# Altium PCB SL1 Xilinx Spartan-IIE PQ208 Rev1.01.PcbDoc (part 1 of 3)
Units mil, origin at the board's own origin, x right, y up, seen from the top; angles counter-clockwise.
Board outline 7087.04 x 1988.61 mil, 2 copper layers (Top Layer, Bottom Layer), stack 64.8 mil thick; 115 components, 126 nets, 642 pads, 225 vias.
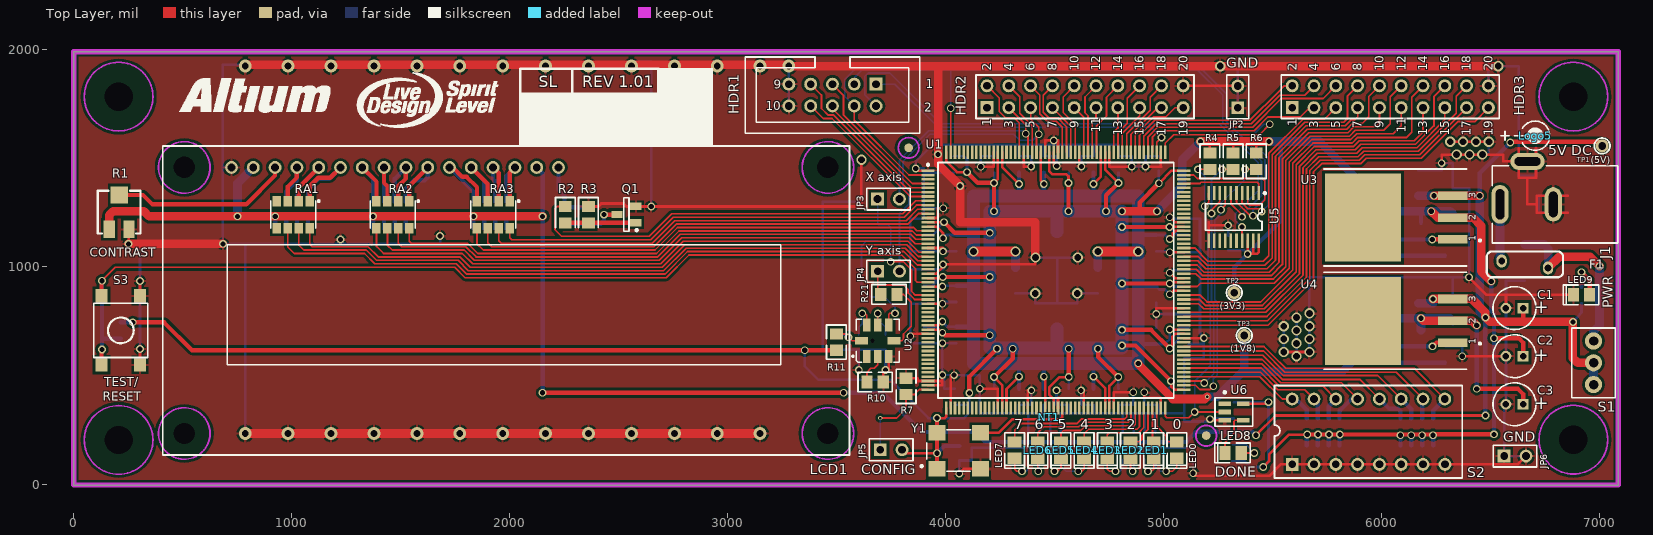
[diagram p0: Top Layer view]
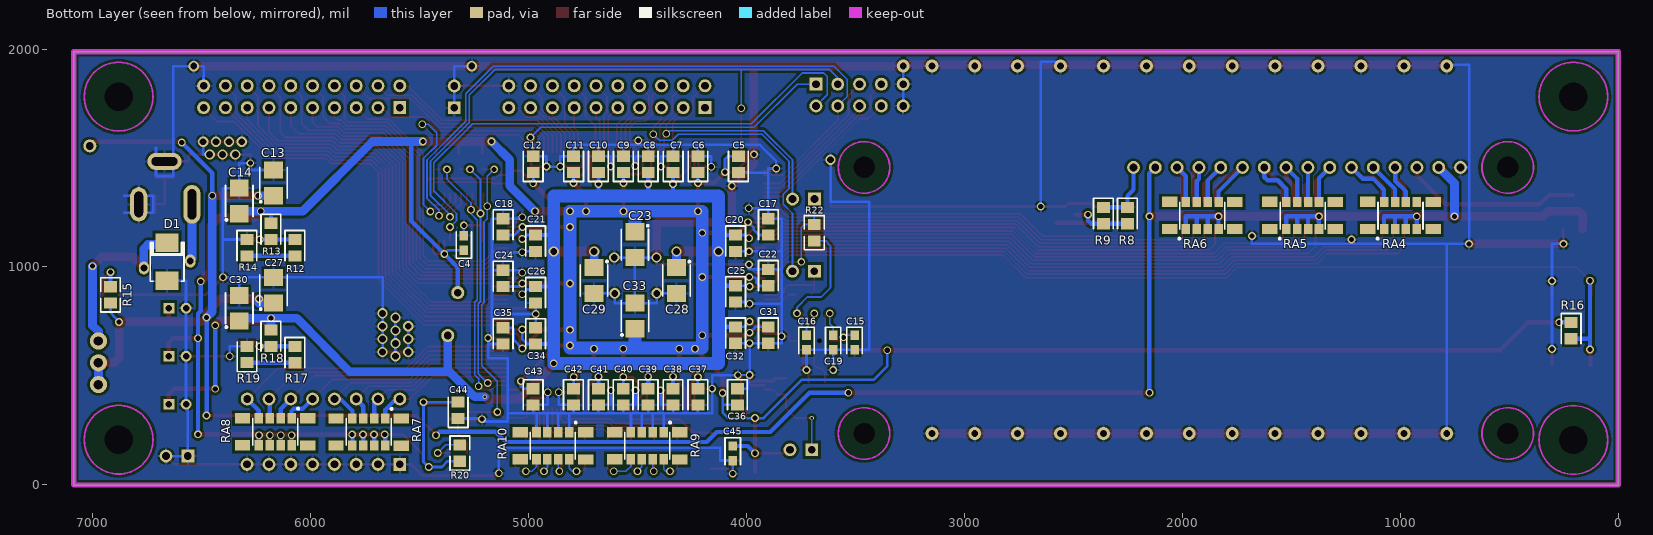
[diagram p1: Bottom Layer view, seen from below]

## Layer stack, top to bottom
Top Solder: solder mask 0.4, Solder Resist, Dk 3.5
Top Layer: signal copper 1.4
Dielectric1: core 62, FR-4, Dk 4.8
Bottom Layer: signal copper 1.4
Bottom Solder: solder mask 0.4, Solder Resist, Dk 3.5

## Board outline
0,-0.21 cw(c0,0) -0.21,0 -0.21,1988.19 cw(c0,1988.19) 0,1988.4 7086.61,1988.4 cw(c7086.61,1988.19) 7086.83,1988.19 7086.83,0 cw(c7086.61,0) 7086.61,-0.21

## Design rules (kind name [scope] priority, off if disabled: settings)
Clearance "Clearance_Power Polygon" [inpolygon and innetclass('Power')] p1: gap=11.81 ignorepadtopadclearanceinfootprint=FALSE except(0: Arc-Hole Track-Hole SMDPad-Hole THPad-Hole Via-Hole Fill-Hole Poly-Hole Region-Hole Text-Hole)
Clearance [All] p2: gap=7.87 ignorepadtopadclearanceinfootprint=FALSE except(0: Arc-Hole Track-Hole SMDPad-Hole THPad-Hole Via-Hole Fill-Hole Poly-Hole Region-Hole Text-Hole) // General
ComponentClearance ComponentClearance_D1_F1 [InComponent('D1') vs InComponent('F1')] p1 off: gap=1.18 collisioncheckmode=3 verticalgap=10 showdistances=FALSE
ComponentClearance ComponentClearance_JP4_R21 [InComponent('JP4') vs InComponent('R21')] p2 off: gap=2.76 collisioncheckmode=3 verticalgap=10 showdistances=FALSE
ComponentClearance ComponentClearance_LCD1_U2 [InComponent('LCD1') vs InComponent('U2')] p3 off: gap=3.54 collisioncheckmode=3 verticalgap=10 showdistances=FALSE
ComponentClearance ComponentClearance_U1_U6 [InComponent('U1') vs InComponent('U6')] p4 off: gap=3.94 collisioncheckmode=3 verticalgap=10 showdistances=FALSE
ComponentClearance ComponentClearance_S2 [InComponent('S2') vs InComponent('RA7') Or InComponent('RA8')] p5 off: gap=3.94 collisioncheckmode=3 verticalgap=10 showdistances=FALSE // Why is such a small clearance necessary?
ComponentClearance ComponentClearance_LCD1_R11 [InComponent('LCD1') vs InComponent('R11')] p6 off: gap=6.3 collisioncheckmode=3 verticalgap=10 showdistances=FALSE
ComponentClearance ComponentClearance_J1_Logo5 [InComponent('J1') vs InComponent('Logo5')] p7 off: gap=7.48 collisioncheckmode=3 verticalgap=10 showdistances=FALSE
ComponentClearance ComponentClearance_R2_R3 [InComponent('R2') vs InComponent('R3')] p8 off: gap=7.48 collisioncheckmode=3 verticalgap=10 showdistances=FALSE
ComponentClearance ComponentClearance_R5 [InComponent('R5') vs InComponent('R4') Or InComponent('R6')] p9 off: gap=7.48 collisioncheckmode=3 verticalgap=10 showdistances=FALSE
ComponentClearance ComponentClearance_LEDs [HasFootprint('SMD _LED') vs HasFootprint('SMD _LED')] p10 off: gap=7.48 collisioncheckmode=3 verticalgap=10 showdistances=FALSE
ComponentClearance ComponentClearance_R7_R10 [InComponent('R7') vs InComponent('R10')] p11 off: gap=9.45 collisioncheckmode=3 verticalgap=10 showdistances=FALSE
ComponentClearance ComponentClearance_U1 [InComponent('U1') vs Not InComponent('NT1') && Not InComponent('LED8')] p12 off: gap=10 collisioncheckmode=3 verticalgap=10 showdistances=FALSE
ComponentClearance ComponentClearance_General [Not InComponent('U1') vs Not InComponent('U1')] p13 off: gap=10 collisioncheckmode=3 verticalgap=10 showdistances=FALSE
ComponentClearance ComponentClearance_Default [All] p14: gap=5 collisioncheckmode=3 verticalgap=10 showdistances=FALSE
FabricationTestPointUsage TestPointUsage [All] p1 off: valid=0 allowmultiple=FALSE
FabricationTestpoint Testpoint [All] p1 off: side=3 testpointundercomponent=TRUE minsize=40 maxsize=100 preferedsize=60 minholesize=0 maxholesize=40 preferedholesize=32 testpointgrid=1 allowsidetop=TRUE allowsidebottom=TRUE usegrid=TRUE gridtolerance=0.01
HoleSize [All] p1: absolutevalues=TRUE maxlimit=350 minlimit=0 maxpercent=80.000 minpercent=20.000
PlaneConnect [All] p1: planeconnectstyle=Relief reliefexpansion=11.81 reliefentries=4 reliefconductorwidth=7.87 reliefairgap=7.87
PolygonConnect PolygonConnect_Power [innetclass('Power')] p1: connectstyle=Relief reliefconductorwidth=11.81 reliefentries=4 polygonreliefangle="90 Angle" airgapwidth=10
PolygonConnect [All] p2: connectstyle=Relief reliefconductorwidth=7.87 reliefentries=4 polygonreliefangle="90 Angle" airgapwidth=10
RoutingVias RoutingVias_Power [innetclass('Power')] p1: holewidth=23.62 width=35.43 viastyle="Through Hole" minholewidth=11.81 minwidth=19.68 maxholewidth=31.5 maxwidth=59.06
RoutingVias [All] p2: holewidth=23.62 width=35.43 viastyle="Through Hole" minholewidth=11.81 minwidth=19.68 maxholewidth=23.62 maxwidth=35.43
SilkToSolderMaskClearance SilkscreenOverComponentPads [IsPad] p1: minsilkscreentomaskgap=10 clearancetoexposedcopper=TRUE
SolderMaskExpansion SolderMaskExpansion_Power_Vias [isvia] p1: expansion=0 istentingtop=FALSE
SolderMaskExpansion [All] p2: expansion=3.94 istentingtop=FALSE
Width Width_Power [innetclass('Power') and not inpolygon] p1: maxlimit=78.74 minlimit=11.81 preferedwidth=11.81
Width [All] p2: maxlimit=78.74 minlimit=7.87 preferedwidth=7.87
24 further rules are at their usual default settings.

## Classes and differential pairs
component class U_SL_LCD_SW_LED: LCD1 LED0 LED1 LED2 LED3 LED4 LED5 LED6 LED7 Q1 R1 R2 R3 R8 R9 R16 RA1 RA2 RA3 RA4 RA5 RA6 RA7 RA8 RA9 RA10 S2 S3
component class U_SL_FPGA_Auto_2E: U1
component class U_SL_Config: C4 C44 LED8 R4 R5 R6 R20 U5 U6
component class SL_FPGA_Manual_2E: C1 C2 C3 C5 C6 C7 C8 C9 C10 C11 C12 C13 C14 C17 C18 C20 C21 C22 C23 C24 C25 C26 C27 C28 C29 C30 C31 C32 C33 C34 C35 C36 C37 C38 C39 C40 C41 C42 C43 D1 F1 J1 JP2 JP6 LED9 R12 R13 R14 R15 R17 R18 R19 S1 TP1 TP2 TP3 U3 U4
net class SW[7..0]: SW0 SW1 SW2 SW3 SW4 SW5 SW6 SW7
net class LEDS[7..0]: LEDS0 LEDS1 LEDS2 LEDS3 LEDS4 LEDS5 LEDS6 LEDS7
net class LCD_DB[7..0]: LCD_DB0 LCD_DB1 LCD_DB2 LCD_DB3 LCD_DB4 LCD_DB5 LCD_DB6 LCD_DB7
net class Power: 5V GND VCCINT VCCO

## Components (designator, comment, footprint, x,y, rotation, side; value= is the part's Value field where it differs from the comment)
C1 "100uF 16V" CAPPR2-5X6.8 6610.24,811.02 r180 top
C2 "100uF 16V" CAPPR2-5X6.8 6610.24,590.55 r180 top
C3 "100uF 16V" CAPPR2-5X6.8 6610.24,370.08 r180 top
C4 "10nF" CC1608-0603 5296.26,1110.24 r90 bottom
C5 "0.1uF" CC2012-0805 4037.4,1470.47 r90 bottom
C6 "0.1uF" CC2012-0805 4222.44,1470.47 r90 bottom
C7 "0.1uF" CC2012-0805 4336.61,1470.47 r90 bottom
C8 "0.1uF" CC2012-0805 4450.79,1470.47 r90 bottom
C9 "0.1uF" CC2012-0805 4564.96,1470.47 r90 bottom
C10 "0.1uF" CC2012-0805 4679.13,1470.47 r90 bottom
C11 "0.1uF" CC2012-0805 4793.31,1470.47 r90 bottom
C12 "0.1uF" CC2012-0805 4978.35,1470.47 r90 bottom
C13 "10uF" MCCT-B 6169.29,1385.83 r90 bottom
C14 "10uF" MCCT-B 6326.77,1303.15 r90 bottom
C15 "100nF" CC1608-0603 3503.94,653.54 r270 bottom
C16 "100nF" CC1608-0603 3724.41,653.54 r270 bottom
C17 "0.1uF" CC2012-0805 3899.61,1184.06 r270 bottom
C18 "0.1uF" CC2012-0805 5116.14,1184.06 r270 bottom
C19 "100nF" CC1608-0603 3602.36,653.54 r270 bottom
C20 "0.1uF" CC2012-0805 4049.21,1109.25 r270 bottom
C21 "0.1uF" CC2012-0805 4966.54,1109.25 r270 bottom
C22 "0.1uF" CC2012-0805 3899.61,951.77 r270 bottom
C23 "10uF" MCCT-B 4511.81,1102.36 r270 bottom
C24 "0.1uF" CC2012-0805 5116.14,947.83 r270 bottom
C25 "0.1uF" CC2012-0805 4049.21,876.97 r270 bottom
C26 "0.1uF" CC2012-0805 4966.54,873.03 r270 bottom
C27 "10uF" MCCT-B 6169.29,893.7 r90 bottom
C28 "10uF" MCCT-B 4320.87,937.99 r270 bottom
C29 "10uF" MCCT-B 4698.82,937.99 r270 bottom
C30 "10uF" MCCT-B 6326.77,811.02 r90 bottom
C31 "0.1uF" CC2012-0805 3899.61,687.99 r270 bottom
C32 "0.1uF" CC2012-0805 4049.21,687.99 r270 bottom
C33 "10uF" MCCT-B 4511.81,775.59 r90 bottom
C34 "0.1uF" CC2012-0805 4966.54,684.06 r270 bottom
C35 "0.1uF" CC2012-0805 5116.14,684.06 r270 bottom
C36 "0.1uF" CC2012-0805 4041.34,404.53 r270 bottom
C37 "0.1uF" CC2012-0805 4222.44,404.53 r270 bottom
C38 "0.1uF" CC2012-0805 4336.61,404.53 r270 bottom
C39 "0.1uF" CC2012-0805 4450.79,404.53 r270 bottom
C40 "0.1uF" CC2012-0805 4564.96,404.53 r270 bottom
C41 "0.1uF" CC2012-0805 4679.13,404.53 r270 bottom
C42 "0.1uF" CC2012-0805 4793.31,404.53 r270 bottom
C43 "0.1uF" CC2012-0805 4978.35,404.53 r270 bottom
C44 "0.1uF" CC2012-0805 5322.83,342.52 r90 bottom
C45 "10nF" CC1608-0603 4062.99,145.67 r270 bottom
D1 "SM6T6V8A" DO214 6657.48,1023.58 r90 bottom
F1 "Polyswitch, 1.1A" RUE160_0.2 6657.48,1011.81 r0 top
HDR1 "Header 5X2" HDR2X5_LP 3681.1,1838.58 r0 top
HDR2 "Header 10X2" HDR2X10 4190.55,1730.71 r0 top locked
HDR3 "Header 10X2" HDR2X10 5590.55,1730.71 r0 top locked
J1 "KLD-0202-B" KLD-0202 7082.68,1287.4 r180 top
JP2 "GND" HDR1X2 5340.55,1730.71 r90 top locked
JP3 "X axis" HDR1X2 3688.72,1311.42 r0 top
JP4 "Y axis" HDR1X2 3688.98,980.31 r0 top
JP5 "CONFIG" HDR1X2 3700.79,161.42 r0 top
JP6 "GND" HDR1X2 6562.99,132.53 r0 top
LCD1 "162A" 162A 724.41,1456.69 r0 top locked
LED0 "HSMH-C170" "SMD _LED" 5061.02,160.43 r90 top
LED1 "HSMH-C170" "SMD _LED" 4954.72,160.43 r90 top
LED2 "HSMH-C170" "SMD _LED" 4848.43,160.43 r90 top
LED3 "HSMH-C170" "SMD _LED" 4742.13,160.43 r90 top
LED4 "HSMH-C170" "SMD _LED" 4635.83,160.43 r90 top
LED5 "HSMH-C170" "SMD _LED" 4529.53,160.43 r90 top
LED6 "HSMH-C170" "SMD _LED" 4423.23,160.43 r90 top
LED7 "HSMH-C170" "SMD _LED" 4316.93,160.43 r90 top
LED8 "HSMH-C170" "SMD _LED" 5318.9,146.65 r0 top
LED9 "HSMH-C170" "SMD _LED" 6917.32,872.05 r0 top
Logo5 "5V" "5V SYMBOL" 6704.72,1602.36 r0 top
NT1 "GND" NT 4475.83,321.81 r270 top net-tie
Q1 "2N7002" SO-G3 2535.43,1240.16 r90 top
R1 "20K" POT4MM-2 208.66,1251.97 r90 top
R2 "560R" CC2012-0805 2255.91,1240.16 r270 top
R3 "10K" CC2012-0805 2362.2,1240.16 r270 top
R4 "4K7" CR2012-0805 5212.6,1485.24 r270 top
R5 "4K7" CR2012-0805 5318.9,1485.24 r270 top
R6 "4K7" CR2012-0805 5425.2,1485.24 r270 top
R7 "1K" CR2012-0805 3818.9,452.76 r270 top
R8 "68R" CC2012-0805 2251.97,1236.21 r270 bottom
R9 "68R" CC2012-0805 2362.2,1236.21 r270 bottom
R10 "680R" CR2012-0805 3677.17,472.44 r180 top
R11 "0R" CR2012-0805 3499.21,655.51 r90 top
R12 "100R" CC2012-0805 6070.87,1088.58 r270 bottom
R13 "120R" CC2012-0805 6181.1,1163.38 r270 bottom
R14 "100R" CC2012-0805 6291.34,1088.58 r270 bottom
R15 "270R" CR2012-0805 6917.32,872.04 r270 bottom
R16 "4K7" CC2012-0805 216.54,708.65 r270 bottom
R17 "47R" CC2012-0805 6070.87,598.42 r270 bottom
R18 "120R" CC2012-0805 6181.1,673.22 r270 bottom
R19 "5R6" CC2012-0805 6291.34,598.43 r90 bottom
R20 "270R" CR2012-0805 5314.96,146.65 r270 bottom
R21 "100R" CR2012-0805 3740.16,874.02 r0 top
R22 "100R" CR2012-0805 3688.98,1157.47 r270 bottom
RA1 "270R" MNR34 1007.87,1240.16 r270 top
RA2 "270R" MNR34 1464.57,1240.16 r270 top
RA3 "270R" MNR34 1925.2,1240.16 r270 top
RA4 "4K7" MNR34T 1000,1236.22 r270 bottom
RA5 "4K7" MNR34T 1448.82,1236.22 r270 bottom
RA6 "4K7" MNR34T 1909.45,1236.22 r270 bottom
RA7 "4K7" MNR34T 5732.48,243.09 r90 bottom
RA8 "4K7" MNR34T 6161.42,244.09 r90 bottom
RA9 "270R" MNR34T 4454.72,180.1 r90 bottom
RA10 "270R" MNR34T 4887.8,180.1 r90 bottom
S1 "TL36WW050" PCB_SWITCH 6972.64,460.18 r90 top
S2 "A6ER-8104" DIP-16-KEY 5590.55,94.49 r0 top
S3 "DTSM-61-NR" B3FS_SWITCH 216.54,708.66 r270 top
TP1 "(5V)" TP 7011.81,1555.12 r0 top
TP2 "(3V3)" TP 5324.13,881.88 r0 top
TP3 "(1V8)" TP 5370.08,685.04 r0 top
U1 "XC2S300E-6PQ208C" PQ208 4505.91,939.96 r0 top locked
U2 "ADXL202E" E-8 3688.98,661.42 r90 top
U3 "LM1084IS-ADJ" TO-263 6326.77,1126.77 r90 top
U4 "LM1084IS-ADJ" TO-263 6326.77,653.54 r90 top
U5 "XCF02SVO20C" VO20 5321.85,1229.33 r180 top
U6 "SN74LVC1G04DBV" SO-G5/P.95 5322.83,334.65 r270 top
Y1 "25MHz" QSMO_4200 3960.63,59.06 r0 top

## Footprints (in the part's own frame and the unit in brackets; to place one, negate y for a bottom-side part, rotate by r counter-clockwise, add the part's x,y. Pads: shape width x height; smd on the part's side, far side on the other; paste and mask are expansions set on the pad)
"5V SYMBOL" [mil]
  silkscreen extent -158,-67 67,67
162A [mm]
  round 1.5 hole 0.9: 1(0,0) 2(2.54,0) 3(5.08,0) 4(7.62,0) 5(10.16,0) 6(12.7,0) 7(15.24,0) 8(17.78,0) 9(20.32,0) 10(22.86,0) 11(25.4,0) 12(27.94,0) 13(30.48,0) 14(33.02,0) 15(35.56,0) 16(38.1,0)
  round 2.3 hole 2.5 unplated: M1(-5.5,0) M2(69.5,0) M3(-5.5,-31) M4(69.5,-31)
  Keep-Out Layer circle w0.2: c-5.5,0 r3
  Keep-Out Layer circle w0.2: c-5.5,-31 r3
  Keep-Out Layer circle w0.2: c69.5,-31 r3
  Keep-Out Layer circle w0.2: c69.5,0 r3
  silkscreen extent -8,-33.5 72,2.5, body extent -8.01,-33.5 72,2.5, height 10.16
B3FS_SWITCH [mm]
  rect 1.6x1.4 smd: 1(3.998,-2.244) 2(-4.012,-2.244) 3(3.998,2.246) 4(-4.012,2.246)
  silkscreen extent -3.17,-3.15 3.14,3.16, body extent -4.57,-3.15 4.57,3.16, height 4.57
CAPPR2-5X6.8 [mm]
  rect 1.25x1.25 hole 0.75: 1(-0.994,-0.009)
  round 1.25 hole 0.75: 2(1.006,-0.009)
  silkscreen extent -2.49,-2.51 2.5,2.49, body extent -2.49,-2.51 2.51,2.49, height 10.16
CC1608-0603 [mm]
  rect 1.1x1 smd: 1(-0.843,0.001) 2(0.857,0.001)
  silkscreen extent -1.79,-0.9 1.31,0.9, body extent -1.46,-0.57 1.46,0.57, height 0.76
CC2012-0805 [mm]
  rect 1.3x1.5 smd: 1(-0.945,-0.007) 2(0.955,-0.007)
  silkscreen extent -1.99,-1.16 1.51,1.14, body extent -1.52,-0.7 1.52,0.7, height 0.76
CR2012-0805 [mm]
  rect 1.3x1.5 smd: 1(-0.946,0) 2(0.954,0)
  silkscreen extent -2,-1.15 2,1.15, body extent -1.52,-0.7 1.52,0.7, height 0.76
DIP-16-KEY [mm]
  rect 1.5x1.5 hole 0.9: 1(-0.011,0.001)
  round 1.5 hole 0.9: 2(2.529,0.001) 3(5.069,0.001) 4(7.609,0.001) 5(10.149,0.001) 6(12.689,0.001) 7(15.229,0.001) 8(17.789,0.001) 9(17.769,7.621) 10(15.229,7.621) 11(12.689,7.621) 12(10.149,7.621) 13(7.609,7.621) 14(5.069,7.621) 15(2.529,7.621) 16(-0.011,7.621)
  silkscreen extent -2.06,-1.59 19.82,9.2, body extent -2.03,-1.52 19.81,9.14, height 7.11
DO214 [mil]
  rect 85x106.3 smd: 1(-87.01,0.18) 2(87.99,0.18)
  silkscreen extent -90,-77 90,78, body extent -125,-50 125,50, height 50
E-8 [mil]
  round 15 hole 20 unplated: 0(-0.02,23.98)
  rect 60x35 smd: 1(-72.85,49.98) 2(-72.85,-0.02) 3(-72.85,-50.02) 5(72.82,-50.02) 6(72.82,-0.02) 7(72.82,49.98)
  rect 35x60 smd: 4(-0.02,-74.82) 8(-0.02,74.79)
  silkscreen extent -98,-98 99,118, body extent -95,-95 95,95, height 80
HDR1X2 [mm]
  rect 1.5x1.5 hole 0.9: 1(-0.011,0.007)
  round 1.5 hole 0.9: 2(2.529,0.007)
  silkscreen extent -1.28,-1.26 3.8,1.28, body extent -1.27,-1.27 3.81,1.27, height 10
HDR2X5_LP [mm]
  rect 1.5x1.5 hole 0.9: 1(0.003,0.004)
  round 1.5 hole 0.9: 2(0.003,-2.536) 3(-2.537,0.004) 4(-2.537,-2.536) 5(-5.077,0.004) 6(-5.077,-2.536) 7(-7.617,0.004) 8(-7.617,-2.536) 9(-10.157,0.004) 10(-10.157,-2.536)
  silkscreen extent -15.24,-5.71 5.08,3.18, body extent -15.24,-5.71 5.08,3.18, height 10
HDR2X10 [mm]
  rect 1.5x1.5 hole 0.9: 1(-0.011,0.007)
  round 1.5 hole 0.9: 2(-0.011,2.547) 3(2.529,0.007) 4(2.529,2.547) 5(5.069,0.007) 6(5.069,2.547) 7(7.609,0.007) 8(7.609,2.547) 9(10.149,0.007) 10(10.149,2.547) 11(12.689,0.007) 12(12.689,2.547) 13(15.229,0.007) 14(15.229,2.547) 15(17.769,0.007) 16(17.769,2.547) 17(20.309,0.007) 18(20.309,2.547) 19(22.849,0.007) 20(22.849,2.547)
  silkscreen extent -1.28,-1.26 24.12,3.82, body extent -1.27,-1.27 24.13,3.81, height 10
KLD-0202 [mm]
  oval 2x4.5 hole 1 slot 3.5 at 90 deg: 1(13.692,-0.001)
  oval 2x4 hole 1 slot 3 at 90 deg: 2(7.492,-0.001)
  oval 4x2 hole 1 slot 3 at 0 deg: 3(10.492,-5.001)
  silkscreen extent -0.01,-4.5 14.59,4.5, body extent 0,-4.44 14.6,4.45, height 7.62
MCCT-B [mm]
  rect 2x2.2 smd: 1(-1.505,-0.002) 2(1.495,-0.002)
  silkscreen extent -2.3,-1.6 1.8,1.6, body extent -2.29,-0.89 2.29,0.89, height 1.27
MNR34 [mm]
  rect 1.2x1 smd: 1(-1.578,1.898) 2(-1.578,0.628) 3(-1.578,-0.642) 4(-1.578,-1.912) 5(1.572,-1.912) 6(1.572,-0.642) 7(1.572,0.628) 8(1.572,1.898)
  silkscreen extent -1.68,-2.62 1.55,3.06, body extent -2.03,-2.29 2.03,2.29, height 1.27
MNR34T [mm]
  rect 1.2x1 smd: 1(1.575,-1.896) 2(1.575,-0.626) 3(1.575,0.644) 4(1.575,1.914) 5(-1.575,1.914) 6(-1.575,0.644) 7(-1.575,-0.626) 8(-1.575,-1.896)
  rect 1.2x1.8 smd: STP(-1.6,-3.801) STP(-1.575,3.819) STP(1.575,-3.801) STP(1.575,3.819)
  silkscreen extent -1.55,-2.76 2.79,2.62, body extent -1.65,-2.71 1.68,2.72, height 2
NT [mm]
  rect 0.2x0.2 smd: 1(0.01,0.011) 2(0.51,0.011)
  Top Layer lines w0.3: 0.51,0.011 0.01,0.011
PCB_SWITCH [mm]
  round 2 hole 1.1: 1(0.011,0.005) 2(2.551,0.005) 3(5.091,0.005)
  silkscreen extent -1.54,-2.53 6.59,2.55, body extent -1.52,-2.54 6.6,2.54, height 15
POT4MM-2 [mm]
  rect 2x1.3 smd: CCW(-2.008,-1.162) CW(-2.008,1.138)
  rect 2x2 smd: W(1.992,-0.012)
  silkscreen extent -2.51,-2.51 2.49,2.49, body extent -2.92,-2.41 2.92,2.41, height 3.05
PQ208 [mm]
  rect 1.55x0.3 smd: 1(-14.902,12.738) 2(-14.902,12.238) 3(-14.902,11.738) 4(-14.902,11.238) 5(-14.902,10.738) 6(-14.902,10.238) 7(-14.902,9.738) 8(-14.902,9.238) 9(-14.902,8.738) 10(-14.902,8.238) 11(-14.902,7.738) 12(-14.902,7.238) 13(-14.902,6.738) 14(-14.902,6.238) 15(-14.902,5.738) 16(-14.902,5.238) 17(-14.902,4.738) 18(-14.902,4.238) 19(-14.902,3.738) 20(-14.902,3.238) 21(-14.902,2.738) 22(-14.902,2.238) 23(-14.902,1.738) 24(-14.902,1.238) 25(-14.902,0.738) 26(-14.902,0.238) 27(-14.902,-0.262) 28(-14.902,-0.762) 29(-14.902,-1.262) 30(-14.902,-1.762) 31(-14.902,-2.262) 32(-14.902,-2.762) 33(-14.902,-3.262) 34(-14.902,-3.762) 35(-14.902,-4.262) 36(-14.902,-4.762) 37(-14.902,-5.262) 38(-14.902,-5.762) 39(-14.902,-6.262) 40(-14.902,-6.762) 41(-14.902,-7.262) 42(-14.902,-7.762) 43(-14.902,-8.262) 44(-14.902,-8.762) 45(-14.902,-9.262) 46(-14.902,-9.762) 47(-14.902,-10.262) 48(-14.902,-10.762) 49(-14.902,-11.262) 50(-14.902,-11.762) 51(-14.902,-12.262) 52(-14.902,-12.762) 105(14.898,-12.762) 106(14.898,-12.262) 107(14.898,-11.762) 108(14.898,-11.262) 109(14.898,-10.762) 110(14.898,-10.262) 111(14.898,-9.762) 112(14.898,-9.262) 113(14.898,-8.762) 114(14.898,-8.262) 115(14.898,-7.762) 116(14.898,-7.262) 117(14.898,-6.762) 118(14.898,-6.262) 119(14.898,-5.762) 120(14.898,-5.262) 121(14.898,-4.762) 122(14.898,-4.262) 123(14.898,-3.762) 124(14.898,-3.262) 125(14.898,-2.762) 126(14.898,-2.262) 127(14.898,-1.762) 128(14.898,-1.262) 129(14.898,-0.762) 130(14.898,-0.262) 131(14.898,0.238) 132(14.898,0.738) 133(14.898,1.238) 134(14.898,1.738) 135(14.898,2.238) 136(14.898,2.738) 137(14.898,3.238) 138(14.898,3.738) 139(14.898,4.238) 140(14.898,4.738) 141(14.898,5.238) 142(14.898,5.738) 143(14.898,6.238) 144(14.898,6.738) 145(14.898,7.238) 146(14.898,7.738) 147(14.898,8.238) 148(14.898,8.738) 149(14.898,9.238) 150(14.898,9.738) 151(14.898,10.238) 152(14.898,10.738) 153(14.898,11.238) 154(14.898,11.738) 155(14.898,12.238) 156(14.898,12.738)
  rect 0.3x1.55 smd: 53(-12.752,-14.912) 54(-12.252,-14.912) 55(-11.752,-14.912) 56(-11.252,-14.912) 57(-10.752,-14.912) 58(-10.252,-14.912) 59(-9.752,-14.912) 60(-9.252,-14.912) 61(-8.752,-14.912) 62(-8.252,-14.912) 63(-7.752,-14.912) 64(-7.252,-14.912) 65(-6.752,-14.912) 66(-6.252,-14.912) 67(-5.752,-14.912) 68(-5.252,-14.912) 69(-4.752,-14.912) 70(-4.252,-14.912) 71(-3.752,-14.912) 72(-3.252,-14.912) 73(-2.752,-14.912) 74(-2.252,-14.912) 75(-1.752,-14.912) 76(-1.252,-14.912) 77(-0.752,-14.912) 78(-0.252,-14.912) 79(0.248,-14.912) 80(0.748,-14.912) 81(1.248,-14.912) 82(1.748,-14.912) 83(2.248,-14.912) 84(2.748,-14.912) 85(3.248,-14.912) 86(3.748,-14.912) 87(4.248,-14.912) 88(4.748,-14.912) 89(5.248,-14.912) 90(5.748,-14.912) 91(6.248,-14.912) 92(6.748,-14.912) 93(7.248,-14.912) 94(7.748,-14.912) 95(8.248,-14.912) 96(8.748,-14.912) 97(9.248,-14.912) 98(9.748,-14.912) 99(10.248,-14.912) 100(10.748,-14.912) 101(11.248,-14.912) 102(11.748,-14.912) 103(12.248,-14.912) 104(12.748,-14.912) 157(12.748,14.888) 158(12.248,14.888) 159(11.748,14.888) 160(11.248,14.888) 161(10.748,14.888) 162(10.248,14.888) 163(9.748,14.888) 164(9.248,14.888) 165(8.748,14.888) 166(8.248,14.888) 167(7.748,14.888) 168(7.248,14.888) 169(6.748,14.888) 170(6.248,14.888) 171(5.748,14.888) 172(5.248,14.888) 173(4.748,14.888) 174(4.248,14.888) 175(3.748,14.888) 176(3.248,14.888) 177(2.748,14.888) 178(2.248,14.888) 179(1.748,14.888) 180(1.248,14.888) 181(0.748,14.888) 182(0.248,14.888) 183(-0.252,14.888) 184(-0.752,14.888) 185(-1.252,14.888) 186(-1.752,14.888) 187(-2.252,14.888) 188(-2.752,14.888) 189(-3.252,14.888) 190(-3.752,14.888) 191(-4.252,14.888) 192(-4.752,14.888) 193(-5.252,14.888) 194(-5.752,14.888) 195(-6.252,14.888) 196(-6.752,14.888) 197(-7.252,14.888) 198(-7.752,14.888) 199(-8.252,14.888) 200(-8.752,14.888) 201(-9.252,14.888) 202(-9.752,14.888) 203(-10.252,14.888) 204(-10.752,14.888) 205(-11.252,14.888) 206(-11.752,14.888) 207(-12.252,14.888) 208(-12.752,14.888)
  round 1 smd: FID1(-17.152,15.413) FID2(17.523,-18.112)
  Top Layer keep-out circle w0.2: c-17.152,15.413 r1.2
  Top Layer keep-out circle w0.2: c17.523,-18.137 r1.2
  silkscreen extent -15.03,-13.74 13.72,13.71, body extent -15.35,-15.36 15.35,15.34, height 2.5
QSMO_4200 [mm]
  rect 2x1.8 smd: 1(-0.009,0.39) 2(5.071,0.39) 3(5.071,4.59) 4(-0.009,4.59)
  silkscreen extent -1.91,0.09 6.21,4.94, body extent -1.14,-0.32 6.1,5.3, height 1.5
RUE160_0.2 [mm]
  oval 1.2x1.5 hole 0.8: 1(-2.7,0.4) 2(2.7,-0.4)
  silkscreen extent -4.45,-1.5 4.45,1.5, body extent -4.45,-1.5 4.45,1.5, height 12
"SMD _LED" [mm]
  rect 1.3x1.6 smd: 1(0.948,0.006) 2(-0.952,0.006)
  silkscreen extent -2.13,-1.14 2,1.16, body extent -1.52,-0.64 1.52,0.64, height 1.27
SO-G3 [mm]
  rect 0.85x1.3 smd: 1(-0.939,-1.107) 2(0.961,-1.107) 3(0.011,1.093)
  silkscreen extent -1.94,-1.33 1.96,0.29, body extent -1.65,-1.52 1.65,1.51, height 2.54
SO-G5/P.95 [mm]
  rect 0.55x1.45 smd: 1(-0.954,-1.07) 2(-0.004,-1.07) 3(0.946,-1.07) 4(0.946,1.08) 5(-0.954,1.08)
  silkscreen extent -2.43,-2.19 1.65,2.21, body extent -1.27,-1.78 1.27,1.78, height 0.89
TO-263 [mm]
  rect 1x3.4 smd: 1(-0.006,0.009) 2(2.534,0.009) 3(5.074,0.009)
  rect 10.25x8.9 smd: 4(2.534,10.459)
  silkscreen extent -3.11,-3.29 8.19,15.01, body extent -2.29,-1.14 7.37,14.35, height 2.03
TP [mil]
  round 60 hole 35.43: 1(0.14,0.45)
  silkscreen extent -36,-36 36,36, body extent -36,-36 36,36
VO20 [mm]
  rect 0.3x1.65 smd: 1(-2.929,-2.778) 2(-2.279,-2.778) 3(-1.629,-2.778) 4(-0.979,-2.778) 5(-0.329,-2.778) 6(0.321,-2.778) 7(0.971,-2.778) 8(1.621,-2.778) 9(2.271,-2.778) 10(2.921,-2.778) 11(2.921,2.772) 12(2.271,2.772) 13(1.621,2.772) 14(0.971,2.772) 15(0.321,2.772) 16(-0.329,2.772) 17(-0.979,2.772) 18(-1.629,2.772) 19(-2.279,2.772) 20(-2.929,2.772)
  silkscreen extent -3.75,-2.9 3.3,1.55, body extent -3.3,-3.56 3.3,3.55, height 1.52

## Part data
C1 C2 C3: library part CAP_POLAR_1, "Polar Capacitor"
C4 C5 C6 C7 C8 C9 C10 C11 C12 C15 C16 C17 C18 C19 C20 C21 C22 C24 C25 C26 C31 C32 C34 C35 C36 C37 C38 C39 C40 C41 C42 C43 C44 C45: library part CAP, "Capacitor"
  C4 C45: AEMS Code=2100341
  C5 C6 C7 C8 C9 C10 C11 C12 C17 C18 C20 C21 C22 C24 C25 C26 C31 C32 C34 C35 C36 C37 C38 C39 C40 C41 C42 C43 C44: Supplier=FARNELL, Supplier Code=317-287
  C15 C16 C19: AEMS Code=2101550
C13 C14 C23 C27 C28 C29 C30 C33: library part CAP_POLAR, "Polar Capacitor", Capacitor Type=Tant, AEMS Code=2100110, Supplier=FARNELL, Supplier Code=967-117
D1: library part BZG03C13, "Zener Diode, 6.2V, 5W", Manufacturer=Microsemi, Revision=31-Oct-2003
F1: library part "Fuse 2", "Polyswitch 1.1A, Raychem RUE110", Revision="July-2002: Re-released for DXP Platform.", Supplier=FARNELL, Supplier Code=608-907
HDR1: "Header, 5-Pin, Dual row", Revision="17-Jul-2002: Re-released for DXP Platform."
HDR2 HDR3: "Header, 10-Pin, Dual row", Revision="July-2002: Re-released for DXP Platform."
J1: "Low Voltage Power Supply Connector", Manufacturer=Kycon, AEMS Code=3510211
JP2 JP3 JP4 JP5 JP6: library part "Jumper, 2-Pin", "Jumper, 2-Pin"
LCD1: "16 char * 2 line LCD character display with b/light"
LED0 LED1 LED2 LED3 LED4 LED5 LED6 LED7 LED8 LED9: library part HSMX-C670, "Typical RED GaAs SMD LED Agilent make", AEMS Code=2610081, Revision="July-2002: Re-released for DXP Platform."
NT1: library part "Jumper, 2-Pin_1", "Jumper, 2-Pin"
Q1: "N Channel Mosfet"
R1: library part "RPot SM", "Square Trimming Potentiometer", AEMS Code=1400226
R2 R3 R4 R5 R6 R7 R8 R9 R11 R12 R13 R14 R15 R16 R17 R18 R19 R20: library part RES, "Resistor"
  R2: AEMS Code=1200723
  R3: AEMS Code=1200006JT
  R4 R5 R6 R16: AEMS Code=1200226
  R7: AEMS Code=1200008JN
  R8 R9: AEMS Code=1200821
  R11: AEMS Code=1200075
  R12 R14: AEMS Code=1200012JT
  R13 R18: AEMS Code=1200781
  R15 R20: AEMS Code=1200430
  R17: AEMS Code="CHANGED VALUE"
  R19: AEMS Code=1200069
R10 R21 R22: library part Res1, "Resistor", Revision="July-2002: Re-released for DXP Platform."
  R10: AEMS Code="CHANGED VALUE"
  R21 R22: AEMS Code=1200012JT
RA1 RA2 RA3 RA4 RA5 RA6 RA7 RA8 RA9 RA10: library part MNR34, "3216x4 Resistor Array"
  RA1 RA2 RA3 RA9 RA10: AEMS Code=1310010
  RA4 RA5 RA6 RA7 RA8: AEMS Code=1300330
S1: library part PCB_MOUNT_SWITCH, "SPDT Subminiature Toggle Switch", Supplier=FARNELL, Supplier Code=150-559
S2: "DIP Switch Side actuator long liver Piano Key", Revision="July-2002: Re-released for DXP Platform."
S3: library part B3FS, "SPNA SMD Keyboard Switch"
TP1 TP2 TP3: library part TestPin
U1: "Spartan-IIE 1.8V FPGA, 208-Pin PQFP, Standard Performance, Commercial Grade", PackageDocument="ver1.1, Oct-2002", Code_JEDEC=MS-029-FA-1, ComponentLink1Description="Manufacturer Link", ComponentLink1URL=http://www.xilinx.com/xlnx/xil_prodcat_landingpage.jsp?title=Spartan-IIE, DatasheetDocument=09-Jul-2003, LatestRevisionDate=17-Sep-2003, LatestRevisionNote="Pin names updated to match datasheet, ver2.1.", PackageReference=PQ208, Published=19-Jul-2002, Publisher="Altium Limited"
U2: "Accelerometer with Digital Output"
U3 U4: "5A Low Dropout Possitive Regulators"
U5: "XCF00S Series, Platform Flash In-System Programmable Configuration 3.3V PROM, 20-Pin TSOP, 2-Megabit, Commercial Grade", PackageDocument="ver1.0, May-2003", AEMS Code="CHANGED VALUE", Code_JEDEC=MO-153-AC, DatasheetDocument="ver2.3, May-2004", PackageReference=VO20
U6: library part SN74AHC1G04DBVR, Manufacturer=TI
Y1: library part QSMO_4200, "Surface Mount Crystal Oscillator"

## Free pads (board coordinates)
  round 35.43 hole 23.62 mask+3.94: 0(3985.24,650.59)
  round 118.11 hole 129.92 unplated: M3(206.69,206.69) M3(206.69,1781.5) M3(6879.92,1781.5) M3(6879.92,207.68)

## Via types
v1: diameter 35.43, hole 23.62, Top Layer to Bottom Layer, tented both sides, 166 vias
v2: diameter 59.06, hole 31.5, Top Layer to Bottom Layer, tented both sides, 27 vias
v3: diameter 47.24, hole 31.5, Top Layer to Bottom Layer, 18 vias
v4: diameter 47.24, hole 31.5, Top Layer to Bottom Layer, tented both sides, 11 vias
v5: diameter 19.68, hole 11.81, Top Layer to Bottom Layer, tented both sides, 2 vias
v6: diameter 35.43, hole 23.62, Top Layer to Bottom Layer, 1 vias

## Nets (pads, with @x,y where several pads share a name; then routed paths per layer and width w, separated by ;. In a path a pad name is that pad's centre, name@x,y a point inside that pad or via, vN(x,y) a via of type N, cw(c..) or ccw(c..) an arc to the next point about the centre after c; other vN are vias at no path point)
5V: C1.1 C13.1 C27.1 LCD1.2 LCD1.15 R1.CW R15.2 RA4.1 RA4.2 RA4.3 RA4.4 RA5.1 RA5.2 RA5.3 RA5.4 RA6.1 RA6.2 RA6.3 RA6.4 S1.1 S1.2 TP1.1 U3.3 U4.3 | length 12355.5
  Top Layer w11.81: v1(5424.21,228.35) 5514.76,318.9 v1(6476.38,318.9)
  Top Layer w19.68: v1(2151.57,423.23) v1(3532.48,423.23) ; v1(6590.55,1570.87) 6594.49,1574.8 7000,1574.8 TP1.1@7019.68,1555.12 ; 6649.61,748.03 C1.1@6649.61,811.02
  Top Layer w39.37: R1.CW@163.39,1173.23 163.39,1238.19 181.1,1255.91 322.83,1255.91 346.46,1232.28 v1(2151.57,1232.28) ; v1(6236.22,853.35) 6413.39,854.33 6476.38,791.34 v1(6476.38,768.7) 6497.05,748.03 v1(6877.95,748.03) 6877.95,582.68 6900,560.63 S1.2@6972.44,560.63 ; v1(6240.16,1326.77) v1(6450.79,1326.77)
  Bottom Layer w11.81: v1(6877.95,748.03) 6917.32,791.34 R15.2@6917.32,834.65
  Bottom Layer w19.68: RA4.4@925,1174.22 v1(925.2,1232.28) 1075.2,1232.28 ; RA4.3@975,1174.22 975,1232.09 ; RA4.2@1025,1174.22 1025,1232.09 ; RA4.1@1075,1174.22 1075,1232.09 ; RA5.4@1373.82,1174.22 v1(1374.02,1232.28) 1524.02,1232.28 ; RA5.3@1423.82,1174.22 1423.82,1232.09 ; RA5.2@1473.82,1174.22 1473.82,1232.09 ; RA5.1@1523.82,1174.22 1523.82,1232.09 ; RA6.4@1834.45,1174.22 v1(1834.65,1232.28) 1984.65,1232.28 ; RA6.3@1884.45,1174.22 1884.45,1232.09 ; RA6.2@1934.45,1174.22 1934.45,1232.09 ; RA6.1@1984.45,1174.22 1984.45,1232.09 ; LCD1.15@2124.41,1456.69 2151.57,1429.53 v1(2151.57,423.23) ; v1(3532.48,423.23) 3710.63,423.23 3889.76,244.09 4135.83,243.11 4182.09,196.85 5102.36,196.85 5149.61,244.09 5408.46,244.09 v1(5424.21,228.35) ; v1(6450.79,1326.77) 6450.79,1431.1 v1(6590.55,1570.87) ; v1(6476.38,318.9) v1(6476.38,768.7)
  Bottom Layer w39.37: v1(751.97,1232.28) 751.97,1384.25 LCD1.2@824.41,1456.69 ; C27.1@6169.29,834.65 6236.22,834.65 v1(6236.22,853.35) ; C13.1@6169.29,1326.77 v1(6240.16,1326.77) ; v1(6450.79,1326.77) 6450.79,794.29 v1(6476.38,768.7) ; S1.1@6972.44,460.63 S1.2@6972.44,560.63
CCLK: U1.155 U5.3 | length 609.9
  Top Layer w7.87: U1.155@5092.52,1422.24 5138.78,1422.24 5155.51,1405.51 5454.72,1405.51 5464.57,1395.67 5464.57,1307.09 5441.93,1284.45 5392.72,1284.45 5385.83,1291.34 U5.3@5385.83,1338.58
CLK_BRD: NT1.2 U1.80 Y1.3 | length 446
  Top Layer w11.81: Y1.3@4160.63,240.16 4244.09,240.16 4305.12,301.18 4525.59,301.18 4535.35,310.94 U1.80@4535.35,352.87
CLK_BRD_1: NT1.1 U1.77
DIN: U1.153 U5.1 | length 393.1
  Top Layer w7.87: U1.153@5092.52,1382.87 5167.32,1382.87 5173.23,1388.78 5430.12,1388.78 5437.01,1381.89 U5.1@5437.01,1338.58
DONE: R4.2 U1.104 U5.10 U6.2 | length 1614
  Top Layer w7.87: U1.104@5007.87,353.35 5007.87,314.96 5014.76,308.07 5116.14,308.07 v1(5142.72,334.65) U6.2@5280.51,334.65 ; v1(5157.48,1447.83) R4.2@5212.6,1447.83 ; v1(5188.98,1278.54) 5206.69,1296.26 U5.10@5206.69,1338.58
  Bottom Layer w7.87: v1(5142.72,334.65) 5142.72,475.39 5214.57,547.24 5214.57,825.43 5203.74,836.26 5203.74,1206.26 5188.98,1221.02 5188.98,1416.34 v1(5157.48,1447.83)
GND: C1.2 C2.2 C3.2 C4.2 C5.1 C6.2 C7.2 C8.2 C9.2 C10.2 C11.2 C12.2 C13.2 C14.2 C15.2 C16.2 C17.1 C18.1 C19.2 C20.2 C21.2 C22.1 C23.2 C24.1 C25.2 C26.2 C27.2 C28.2 C29.2 C30.2 C31.2 C32.2 C33.2 C34.1 C35.2 C36.1 C37.2 C38.2 C39.2 C40.2 C41.2 C42.2 C43.2 C44.1 C45.2 D1.1 HDR1.9 HDR1.10 HDR2.20 HDR3.20 J1.2 J1.3 JP2.1 JP2.2 JP6.1 JP6.2 LCD1.1 LED9.2 pad.0 Q1.2 R1.CCW R3.1 R7.1 R10.1 R14.1 R19.2 RA9.1 RA9.2 RA9.3 RA9.4 RA10.1 RA10.2 RA10.3 RA10.4 S2.1 S2.2 S2.3 S2.4 S2.5 S2.6 S2.7 S2.8 S3.3 S3.4 U1.1 U1.12 U1.19 U1.25 U1.32 U1.39 U1.50 U1.51 U1.54 U1.65 U1.72 U1.79 U1.85 U1.92 U1.103 U1.117 U1.124 U1.131 U1.137 U1.144 U1.158 U1.170 U1.177 U1.182 U1.183 U1.185 U1.190 U1.197 U2.3 U5.11 U6.3 Y1.2 | length 42197.4
  Top Layer w11.81: v1(251.97,1106.3) 253.94,1108.27 R1.CCW@253.94,1173.23 ; S3.3@304.72,550.79 v1(304.72,623.62) ; S3.4@304.72,866.14 v1(304.72,935.43) ; R3.1@2362.21,1277.56 2407.48,1277.56 2421.26,1291.34 2522.64,1291.34 2536.42,1277.56 2578.74,1277.56 v1(2649.61,1277.56) 3614.17,1277.56 v4(3614.17,1492.13) ; R10.1@3714.57,472.44 3714.57,527.56 v1(3724.41,527.56) 3738.98,527.56 U2.3@3738.99,588.57 ; R7.1@3818.45,490.36 3873.03,490.36 3873.03,476.89 U1.50@3919.2,476.89 3985.24,476.89 ; v1(3838.58,682.09) 3838.58,693.43 U1.39@3919.2,693.43 ; v1(3863.19,1451.77) 3863.19,1441.93 U1.1@3919.29,1441.93 ; U1.32@3919.2,831.22 v1@3985.24,831.22 ; U1.25@3919.2,969.02 3956.16,969.02 3988.19,1001.04 v1(3988.19,1011.81) 4412.4,1011.81 v4(4412.4,1043.31) ; U1.19@3919.2,1087.13 3988.19,1087.13 v1(3988.19,1071.85) ; U1.12@3919.2,1224.92 3964.57,1224.92 3964.57,1269.68 v1(3989.17,1269.68) ; U1.51@3919.29,457.68 3985.24,457.68 3985.24,476.89 ; v1(3985.24,504.92) 3985.24,476.89 ; U1.54@4023.54,355.19 4023.54,503.94 v1(4039.37,503.94) ; v1(4062.99,52.17) 4085.63,74.8 Y1.2@4160.63,74.8 ; v1(4157.48,441.93) 4240.07,441.93 U1.65@4240.07,352.87 ; v1(4161.42,1459.65) 4220.39,1459.65 U1.197@4220.39,1526.1 ; U1.190@4358.18,1526.1 4358.18,1460.63 v1(4392.72,1460.63) ; U1.72@4377.87,352.87 4377.87,434.06 v1(4393.7,434.06) ; U1.185@4456.61,1526.1 4456.61,1580.71 ; 4456.69,1580.71 v1(4496.06,1580.71) 4515.66,1580.71 ; U1.183@4495.98,1526.1 4495.98,1463.52 v1(4509.84,1463.52) ; v1(4508.86,434.06) v1@4515.75,434.06 ; U1.79@4515.66,352.87 4515.66,397.55 ; U1.182@4515.66,1526.1 4515.66,1580.71 ; 4515.75,1580.71 4515.66,1580.71 ; v1@4614.09,1460.63 U1.177@4614.09,1526.1 ; v1(4622.05,434.06) v1@4633.77,434.06 ; U1.85@4633.77,352.87 v1@4633.77,434.06 ; v1@4633.86,434.06 v1@4633.77,434.06 ; U1.170@4751.88,1526.1 4751.88,1460.63 v1(4854.33,1460.63) ; U1.92@4771.57,352.87 4771.57,425.2 v1(4861.22,425.2) ; v1(4911.42,425.2) 4911.42,399.61 4988.1,399.61 U1.103@4988.1,352.87 ; v1(4917.32,1460.63) 4988.1,1460.63 ; v1(4966.54,784.45) 4966.54,811.54 U1.124@5092.43,811.54 ; U1.158@4988.1,1526.1 4988.1,1460.63 ; 4988.19,1460.63 4988.1,1460.63 ; v1(5028.54,973.43) 5052.64,949.33 U1.131@5092.43,949.33 ; v6(5028.54,1067.44) U1.137@5092.43,1067.44 ; v1(5028.54,1228.35) 5051.65,1205.24 U1.144@5092.43,1205.24 ; HDR2.20@5090.55,1830.71 JP2.2@5340.55,1830.71 ; U1.117@5092.43,673.74 v1@5185.04,673.74 ; v1(5135.83,54.13) 5145.67,42.32 5485.24,42.32 5537.4,94.49 6624.23,94.49 JP6.2@6662.55,132.81 ; U5.11@5206.69,1120.08 5206.69,1190.94 ; 5206.69,1205.71 5206.69,1190.94 ; v1(5212.58,302.17) 5212.6,297.24 U6.3@5280.51,297.24 ; v1(5296.26,1190.94) 5206.69,1190.94 ; v3(5551.18,610.24) v3@5610.24,610.24 ; v3(5610.24,590.55) v3@5610.24,610.24 ; v3(5669.29,610.24) v3@5610.24,610.24 ; v1(6275.59,1476.38) 6275.59,1515.75 v3(6344.49,1515.75) v3(6403.54,1515.75) v3(6462.6,1515.75) 6558.07,1515.75 6558.07,1484.25 6629.92,1484.25 J1.3@6629.92,1476.38 ; v3(6314.96,1574.8) v3(6374.02,1574.8) v3(6433.07,1574.8) v3(6492.13,1574.8) ; v1(6370.08,590.55) C2.2@6570.87,590.55 ; v1(6401.57,952.76) 6482.28,872.05 6570.87,872.05 ; C1.2@6570.87,826.77 6570.87,872.05 ; 6629.92,1545.46 6629.92,1409.45 6669.29,1409.45 ; 6708.66,1545.46 6708.66,1409.45 6669.29,1409.45 ; 6789.37,872.05 6879.92,872.05 6570.87,872.05 ; 6854.33,1248.03 6712.6,1248.03 6712.6,1288.39 ; 6854.33,1326.77 6787.72,1326.77 6712.6,1326.77 6712.6,1288.39 ; 6669.29,1409.45 6669.29,1288.39 6712.6,1288.39
  Top Layer w39.37: v1(251.97,1106.3) v1(685.04,1106.3) ; v2(787.4,236.22) v2(984.25,236.22) v2(1181.1,236.22) v2(1377.95,236.22) v2(1574.8,236.22) v2(1771.65,236.22) v2(1968.5,236.22) v2(2165.35,236.22) v2(2362.2,236.22) v2(2559.06,236.22) v2(2755.91,236.22) v2(2952.76,236.22) v2(3149.61,236.22) ; v2@787.4,1927.17 v2@3280.51,1927.17 ; v2(3280.51,1921.26) 3965.55,1921.26 ; 3965.55,1921.46 3965.55,1921.26 ; v4(4412.4,1043.31) 4412.4,1204.72 4066.93,1204.72 v1(4066.93,1371.06) 3965.55,1472.44 v1(3965.55,1516.73) 3965.55,1921.26 ; v4(6535.43,1921.26) v4(5259.82,1921.26) 3965.55,1921.26
  Bottom Layer w11.81: v1(251.97,1106.3) 304.72,1106.3 v1(304.72,935.43) v1(304.72,623.62) ; LCD1.1@724.41,1456.69 685.04,1456.69 ; v2(787.4,236.22) 787.4,1106.3 ; v2@787.4,1927.17 685.04,1927.17 685.04,1456.69 ; v1(1224.41,1125.98) 1224.41,1106.3 ; v1(1681.09,1141.73) 1681.09,1106.3 1224.41,1106.3 ; v2@2559.06,1940.93 2649.61,1940.93 v1(2649.61,1277.56) ; HDR1.9@3280.51,1839.17 v2(3280.51,1921.26) v2@3280.51,1927.17 ; HDR1.10@3281.1,1738.58 HDR1.9@3281.1,1838.58 ; v1(3602.36,527.55) C19.2@3602.36,620.08 ; v4(3614.17,1492.13) 3614.17,1300.2 3437.01,1300.2 3437.01,620.08 C19.2@3602.36,620.08 ; v1@3725.49,538.48 v1(3724.41,527.56) 3724.41,620.08 C19.2@3602.36,620.08 ; v1(3988.19,1011.81) 3988.19,989.17 3899.61,989.17 3838.58,989.17 ; v1(3989.17,1269.68) 3899.61,1269.68 ; C5.1@4037.4,1433.07 3899.61,1433.07 ; C36.1@4041.34,441.93 3994.89,441.93 3994.88,495.28 v1(3985.24,504.92) ; C32.2@4049.21,650.59 pad.0@3985.24,650.59 ; C25.2@4049.21,839.57 3993.11,839.57 v1(3985.24,831.69) 3838.58,831.69 ; C20.2@4049.21,1071.85 v1(3988.19,1071.85) 3838.58,1071.85 ; v1(4062.99,52.17) 4062.99,112.2 4120.08,112.2 4120.08,170.28 5135.83,170.28 v1(5135.83,54.13) ; v1(4161.42,1459.65) 4161.42,1507.87 4222.44,1507.87 4222.44,1560.04 ; C37.2@4222.44,367.13 4222.44,366.91 4222.44,329.72 ; C28.2@4320.87,878.94 v4(4411.42,878.94) 4411.42,834.65 C33.2@4511.81,834.65 ; RA9.1@4379.72,242.12 4379.72,329.53 ; v1(4392.72,1460.63) 4392.72,1507.87 4336.61,1507.87 4336.61,1508.09 4336.61,1560.04 ; v1(4393.7,434.06) 4393.7,367.13 4336.61,367.13 4336.61,330.71 4335.63,329.72 ; v4(4412.4,1043.31) C23.2@4511.81,1043.31 ; RA9.2@4429.72,242.12 4429.72,329.53 ; 4450.79,329.72 C39.2@4450.79,367.13 ; RA9.3@4479.72,242.12 4479.72,329.53 ; v1(4496.06,1580.71) 4496.06,1560.04 ; v1(4508.86,434.06) 4508.86,367.13 4564.96,367.13 4564.96,329.72 ; v1(4509.84,1463.52) 4509.84,1507.87 4450.79,1507.87 4450.79,1560.04 ; RA9.4@4529.72,242.12 4529.72,329.53 ; C9.2@4564.96,1507.87 4564.96,1560.04 ; v4(4606.3,1043.31) 4511.88,1043.31 C23.2@4511.81,1043.31 ; v1(4622.05,434.06) 4622.05,367.13 4679.13,367.13 4679.13,329.72 ; v1(4623.03,1460.63) 4623.03,1507.87 4679.13,1507.87 4679.13,1508.09 4679.13,1560.04 ; C29.2@4698.82,878.94 v4(4604.33,878.94) 4604.33,834.65 C33.2@4511.81,834.65 ; 4793.31,329.72 4793.31,367.13 4861.22,367.13 v1(4861.22,425.2) ; RA10.1@4812.8,242.12 4812.8,329.53 ; RA10.2@4862.8,242.12 4862.8,329.53 ; v1(4911.42,425.2) 4911.42,367.13 4978.35,367.13 4978.35,329.72 ; RA10.3@4912.8,242.12 4912.8,329.53 ; RA10.4@4962.8,242.12 4962.8,329.53 ; C34.1@4966.54,721.46 v1(4966.54,784.45) ; C26.2@4966.54,835.63 v1(4966.54,784.45) ; C21.2@4966.81,1071.64 5010.73,1071.63 5014.92,1067.44 v6(5028.54,1067.44) ; C12.2@4978.35,1507.87 4917.32,1507.87 v1(4917.32,1460.63) v1(4854.33,1460.63) 4854.33,1507.87 4793.31,1507.87 4793.31,1560.04 4679.13,1560.04 ; v1(5028.54,973.43) 5040.35,985.24 5116.14,985.24 5167.32,985.24 ; v6@5028.54,1067.91 5167.32,1067.91 ; v1(5028.54,1228.35) 5035.43,1221.46 5116.14,1221.46 5167.32,1221.46 5167.32,985.24 ; C35.2@5116.14,646.65 5185.04,646.65 ; 5167.32,784.45 v1(4966.54,784.45) ; v4(5259.82,1921.26) 5340.55,1921.26 JP2.1@5340.55,1730.71 ; C4.2@5296.26,1143.7 v1(5296.26,1190.94) ; C44.1@5322.83,305.12 5225.39,305.12 v1(5212.58,302.17) 5212.6,291.34 5094.49,291.34 5094.49,329.72 ; v3(5551.18,610.24) v3(5551.18,669.29) v3(5551.18,728.35) ; v3(5610.24,590.55) v3(5610.24,649.61) v3(5610.24,708.66) v3(5610.24,767.72) ; v3(5669.29,610.24) v3(5669.29,669.29) v3(5669.29,728.35) v3(5669.29,787.4) 5669.29,952.76 6169.29,952.76 6326.77,952.76 ; C13.2@6169.29,1444.88 6275.59,1444.88 v1(6275.59,1476.38) 6326.77,1476.38 6326.77,1362.21 6401.57,1362.2 ; R19.2@6291.34,635.83 6370.08,635.83 v1(6370.08,590.55) ; R14.1@6291.34,1125.98 6401.57,1125.98 ; C30.2@6326.77,870.08 6326.77,952.76 ; 6399.61,1362.2 6401.57,1362.2 ; v3(6462.6,1515.75) 6492.13,1515.75 v3(6492.13,1574.8) ; HDR3.20@6490.55,1830.71 6490.55,1830.99 6490.16,1921.26 v4(6535.43,1921.26) 6629.92,1921.26 6629.92,1417.32 6708.66,1417.32 6708.66,1484.29 6708.66,1547.24 ; C3.2@6570.62,370.43 6570.62,360.31 6562.55,352.24 JP6.1@6562.55,132.81 JP6.2@6662.55,132.81 ; C3.2@6570.87,370.43 6570.87,936.02 D1.1@6657.48,936.11 ; 6854.33,1248.03 6720.47,1248.03 6720.47,1326.77 6787.72,1326.77 6854.33,1326.77 ; 685.04,1456.69 v1(685.04,1106.3) 787.4,1106.3 ; 787.4,1106.3 1224.41,1106.3 ; 3838.58,831.69 3838.58,989.17 ; 3838.58,831.69 v1(3838.58,682.09) 3838.58,650.59 3899.61,650.59 pad.0@3985.24,650.59 ; 3838.58,989.17 3838.58,1071.85 ; 3838.58,1071.85 3838.58,1221.46 3899.61,1221.46 3899.61,1269.68 ; 3899.61,1269.68 3899.61,1433.07 ; 3899.61,1433.07 3899.61,1451.77 v1(3863.19,1451.77) 3863.19,1484.25 3938.98,1560.04 4222.44,1560.04 ; v1(3985.24,504.92) pad.0@3985.24,650.59 ; v1(3985.24,504.92) v1(4039.37,503.94) 4157.48,503.94 v1(4157.48,441.93) 4157.48,329.72 4222.44,329.72 ; 4222.44,329.72 4335.63,329.72 ; 4222.44,1560.04 4336.61,1560.04 ; 4335.63,329.72 4978.35,329.72 ; 4336.61,1560.04 4450.79,1560.04 ; 4450.79,1560.04 4496.06,1560.04 ; 4496.06,1560.04 4564.96,1560.04 ; C33.2@4511.81,834.65 C23.2@4511.81,1043.31 ; 4564.96,1560.04 4679.13,1560.04 ; 4978.35,329.72 5094.49,329.72 ; 5094.49,329.72 5094.49,581.69 5185.04,581.69 5185.04,646.65 ; 5167.32,985.24 5167.32,695.87 5185.04,678.15 v1(5185.04,674.21) 5185.04,646.65 ; 6326.77,952.76 v1(6401.57,952.76) 6401.57,1125.98 ; 6401.57,1125.98 6401.57,1362.2
  other v2: 787.4,1921.26 984.25,1921.26 1181.1,1921.26 1377.95,1921.26 1574.8,1921.26 1771.65,1921.26 1968.5,1921.26 2165.35,1921.26 2362.2,1921.26 2559.06,1921.26 2755.91,1921.26 2952.76,1921.26 3149.61,1921.26
HA2: HDR2.2 U1.191 | length 388.5
  Top Layer w7.87: HDR2.2@4190.55,1830.71 4246.06,1775.2 4246.06,1713.58 4275.27,1684.38 4314.61,1684.38 4338.58,1660.41 U1.191@4338.58,1526.57
HA3: HDR2.3 JP3.2 U1.189 | length 1060.3
  Top Layer w7.87: HDR2.3@4290.55,1730.71 4368.11,1653.15 v1(4368.11,1611.22) 4377.95,1599.41 U1.189@4377.95,1526.57
  Bottom Layer w7.87: JP3.2@3788.72,1311.42 3788.72,1491.47 3922.24,1625 4354.33,1625 v1(4368.11,1611.22)
HA4: HDR2.4 U1.188 | length 348.5
  Top Layer w7.87: HDR2.4@4290.55,1830.71 4340.55,1780.71 4340.55,1704.89 4397.64,1647.81 U1.188@4397.64,1526.57
HA5: HDR2.5 JP4.2 U1.187 | length 1452.9
  Top Layer w7.87: HDR2.5@4390.55,1730.71 4390.55,1677.17 4427.17,1640.55 v1(4427.17,1609.25) 4417.32,1599.41 U1.187@4417.32,1526.57
  Bottom Layer w7.87: JP4.2@3788.72,980.71 3788.72,1245.41 3830.71,1287.4 3830.71,1334.65 3804.46,1360.89 3804.46,1484.95 3928.77,1609.25 4312.98,1609.25 4340.54,1581.69 4399.61,1581.69 v1(4427.17,1609.25)
HA6: HDR2.6 U1.181 | length 388.5
  Top Layer w7.87: HDR2.6@4390.55,1830.71 4432.09,1789.17 4432.09,1703.12 4466.9,1668.31 4508.41,1668.31 4535.43,1641.28 U1.181@4535.43,1526.57
HA7: HDR2.7 U1.179 | length 239
  Top Layer w7.87: HDR2.7@4490.55,1730.71 4574.8,1646.46 U1.179@4574.8,1526.57
HA8: HDR2.8 U1.180 | length 390.6
  Top Layer w7.87: HDR2.8@4490.55,1830.71 4447.83,1787.99 4447.83,1709.65 4473.43,1684.06 4514.93,1684.06 4555.12,1643.87 U1.180@4555.12,1526.57
HA9: HDR2.9 U1.176 | length 222.1
  Top Layer w7.87: HDR2.9@4590.55,1730.71 4633.86,1687.4 U1.176@4633.86,1526.57
HA10: HDR2.10 U1.178 | length 348.2
  Top Layer w7.87: HDR2.10@4590.55,1830.71 4539.37,1779.53 4539.37,1708.66 4594.49,1653.54 U1.178@4594.49,1526.57
HA11: HDR2.11 U1.174 | length 211.3
  Top Layer w7.87: U1.174@4673.23,1526.57 4673.23,1668.31 4690.55,1685.63 HDR2.11@4690.55,1730.71
HA12: HDR2.12 U1.175 | length 330.9
  Top Layer w7.87: U1.175@4653.54,1526.57 4653.54,1693.9 4639.76,1707.68 4639.76,1779.92 HDR2.12@4690.55,1830.71
HA13: HDR2.13 U1.169 | length 212
  Top Layer w7.87: U1.169@4771.65,1526.57 4771.65,1618.98 4790.55,1637.88 HDR2.13@4790.55,1730.71
HA14: HDR2.14 U1.173 | length 344.6
  Top Layer w7.87: U1.173@4692.91,1526.57 4692.91,1647.64 4738.19,1692.91 4738.19,1778.35 HDR2.14@4790.55,1830.71
HA15: HDR2.15 U1.167 | length 237.1
  Top Layer w7.87: U1.167@4811.02,1526.57 4811.02,1613.81 4890.55,1693.33 HDR2.15@4890.55,1730.71
HA16: HDR2.16 U1.168 | length 345.2
  Top Layer w7.87: U1.168@4791.34,1526.57 4791.34,1616.39 4833.66,1658.72 4833.66,1773.82 HDR2.16@4890.55,1830.71
HA17: HDR2.17 U1.165 | length 272.6
  Top Layer w7.87: U1.165@4850.39,1526.57 4850.39,1608.27 4972.83,1730.71 HDR2.17@4990.55,1730.71
HA18: HDR2.18 U1.166 | length 370.3
  Top Layer w7.87: U1.166@4830.71,1526.57 4830.71,1611.22 4938.98,1719.49 4938.98,1779.13 HDR2.18@4990.55,1830.71
HA19: HDR2.19 U1.164 | length 351.4
  Top Layer w7.87: U1.164@4870.08,1526.57 4870.08,1605.68 4952.79,1688.4 5010.25,1688.4 5052.56,1730.71 HDR2.19@5090.55,1730.71
HARD_TCK: HDR1.3 U1.207 U5.6 | length 2962.9
  Top Layer w7.87: U1.207@4023.62,1526.57 v1(4023.62,1728.35) ; U5.6@5309.05,1338.58 5309.05,1290.13 5360,1239.18 v1(5360,1230)
  Bottom Layer w7.87: HDR1.3@3581.1,1838.58 3581.1,1868.5 3618.11,1905.51 5154.89,1905.51 5271.65,1788.75 5271.65,1662.4 ; v1(4023.62,1728.35) 4023.62,1905.51 ; 5271.65,1662.77 5280.51,1653.91 5280.51,1653.54 5449.8,1484.25 5449.8,1329.8 5360,1240 v1(5360,1230)
HARD_TDI: HDR1.1 U1.159 | length 1487
  Top Layer w7.87: U1.159@4968.5,1526.57 4968.5,1572.83 v1(4990.16,1594.49)
  Bottom Layer w7.87: HDR1.1@3681.1,1838.58 3767.72,1838.58 3965.55,1640.75 4943.9,1640.75 v1(4990.16,1594.49)
HARD_TDO: HDR1.2 U5.17 | length 2551
  Top Layer w7.87: U5.17@5360.24,1120.08 v1(5360.24,1183.07)
  Bottom Layer w7.87: HDR1.2@3681.1,1738.58 3629.91,1789.78 3629.91,1874 3645.67,1889.76 3744.09,1889.76 3977.36,1656.5 5255.29,1656.5 5304.04,1607.75 5434.06,1477.73 5434.06,1349.06 5330.32,1245.32 5330.32,1212.98 v1(5360.24,1183.07)
HARD_TMS: HDR1.4 U1.2 U5.5 | length 3274.4
  Top Layer w7.87: HDR1.4@3581.1,1738.58 3581.1,1673.23 3832.09,1422.24 U1.2@3919.29,1422.24 ; U5.5@5334.65,1338.58 5334.65,1297.24 5396.89,1235 v1(5410,1235)
  Bottom Layer w7.87: HDR1.4@3581.1,1738.58 3537.4,1782.28 3537.4,1860.24 3598.62,1921.46 5161.22,1921.46 5287.4,1795.28 5287.4,1669.29 5465.55,1491.14 5465.55,1315.55 5410,1260 v1(5410,1235)
HB2: HDR3.2 U1.163 | length 871.6
  Top Layer w7.87: U1.163@4889.76,1526.57 4889.76,1603.1 4959.32,1672.65 5395.82,1672.65 5527.63,1804.46 5553.88,1830.71 HDR3.2@5590.55,1830.71
HB3: HDR3.3 U1.160 | length 866.6
  Top Layer w7.87: U1.160@4948.82,1526.57 4948.82,1595.34 4978.88,1625.4 5415.39,1625.4 5478.29,1688.31 5627.28,1688.31 5669.69,1730.71 HDR3.3@5690.55,1730.71
HB4: HDR3.4 U1.162 | length 950.4
  Top Layer w7.87: U1.162@4909.45,1526.57 4909.45,1600.51 4965.84,1656.9 5402.34,1656.9 5533.83,1788.39 5648.23,1788.39 HDR3.4@5690.55,1830.71
HB5: HDR3.5 U1.138 | length 1290.1
  Top Layer w7.87: U1.138@5092.52,1087.6 5142.35,1087.6 5203.22,1026.73 5457.83,1026.73 5482.28,1051.18 5482.28,1521.04 5640.38,1679.13 5738.98,1679.13 HDR3.5@5790.55,1730.71
HB6: HDR3.6 U1.161 | length 1029.2
  Top Layer w7.87: U1.161@4929.13,1526.57 4929.13,1597.92 4972.36,1641.15 5408.87,1641.15 5540.35,1772.64 5732.48,1772.64 HDR3.6@5790.55,1830.71
HB7: HDR3.7 U1.135 | length 1423.7
  Top Layer w7.87: U1.135@5092.52,1028.54 5156.86,1028.54 5193.28,992.13 5474.41,992.13 5513.78,1031.5 5513.78,1507.99 5653.43,1647.64 5833.29,1647.64 5859.25,1673.6 5859.25,1674.21 5876.97,1674.21 5890.55,1687.8 HDR3.7@5890.55,1730.71
HB8: HDR3.8 U1.136 | length 1493.4
  Top Layer w7.87: U1.136@5092.52,1048.23 5159.45,1048.23 5199.8,1007.87 5464.57,1007.87 5498.03,1041.34 5498.03,1514.51 5646.9,1663.39 5826.77,1663.39 5843.5,1680.12 5843.5,1783.66 HDR3.8@5890.55,1830.71
HB9: HDR3.9 U1.133 | length 1552.2
  Top Layer w7.87: U1.133@5092.52,989.17 5150.59,989.17 5179.13,960.63 5494.09,960.63 5545.28,1011.81 5545.28,1371.06 5545.28,1494.94 5666.47,1616.14 5846.34,1616.14 5872.92,1642.72 5971.46,1642.72 5990.55,1661.81 HDR3.9@5990.55,1730.71
HB10: HDR3.10 U1.134 | length 1601
  Top Layer w7.87: U1.134@5092.52,1008.86 5153.18,1008.86 5185.66,976.38 5484.25,976.38 5529.53,1021.65 5529.53,1501.47 5659.95,1631.89 5839.82,1631.89 5866.39,1658.46 5911.42,1658.46 5941.93,1688.98 5941.93,1782.09 HDR3.10@5990.55,1830.71
HB11: HDR3.11 U1.129 | length 1671.6
  Top Layer w7.87: U1.129@5092.52,910.43 5154.53,910.43 5169.47,925.38 5508.06,925.38 5576.77,994.09 5576.77,1393.7 5576.77,1481.9 5679.52,1584.65 5859.39,1584.65 5885.96,1611.22 6053.15,1611.22 6090.55,1648.62 HDR3.11@6090.55,1730.71
HB12: HDR3.12 U1.132 | length 1732.7
  Top Layer w7.87: U1.132@5092.52,969.49 5147.64,969.49 5172.24,944.88 5503.94,944.88 5561.02,1001.97 5561.02,1488.42 5673,1600.39 5852.86,1600.39 5879.44,1626.97 6010.83,1626.97 6040.35,1656.5 6040.35,1780.51 HDR3.12@6090.55,1830.71
HB13: HDR3.13 U1.126 | length 1837.4
  Top Layer w7.87: U1.126@5092.52,851.38 5164.37,851.38 5191.93,823.82 5453.74,823.82 5608.27,978.35 5608.27,1384.84 5608.27,1468.85 5692.57,1553.15 5872.43,1553.15 5898.02,1578.74 6149.5,1578.74 6190.55,1619.79 HDR3.13@6190.55,1730.71
HB14: HDR3.14 U1.127 | length 1902.4
  Top Layer w7.87: U1.127@5092.52,871.06 5168.31,871.06 5199.8,839.57 5445.87,839.57 5592.52,986.22 5592.52,1385.83 5592.52,1475.38 5686.04,1568.9 5865.91,1568.9 5891.5,1594.49 6115.16,1594.49 6138.78,1618.11 6138.78,1778.94 HDR3.14@6190.55,1830.71
HB15: HDR3.15 U1.123 | length 1908.1
  Top Layer w7.87: U1.123@5092.52,792.32 5469.49,792.32 5639.76,962.6 5639.76,1455.81 5705.61,1521.65 5885.48,1521.65 5911.07,1547.24 6162.54,1547.24 6290.55,1675.25 HDR3.15@6290.55,1730.71
HB16: HDR3.16 U1.125 | length 1997.5
  Top Layer w7.87: U1.125@5092.52,831.69 5160.43,831.69 5184.06,808.07 5461.61,808.07 5624.02,970.47 5624.02,1366.14 5624.02,1462.33 5699.09,1537.4 5878.96,1537.4 5904.55,1562.99 6156.02,1562.99 6240.16,1647.13 6240.16,1780.31 HDR3.16@6290.55,1830.71
HB17: HDR3.17 U1.121 | length 1993.2
  Top Layer w7.87: U1.121@5092.52,752.95 5476.74,752.95 5671.26,947.47 5671.26,1442.76 5718.66,1490.16 5898.52,1490.16 5923.13,1514.76 6174.61,1514.76 HDR3.17@6390.55,1730.71
HB18: HDR3.18 U1.122 | length 2072
  Top Layer w7.87: U1.122@5092.52,772.64 5474.16,772.64 5655.51,953.99 5655.51,1449.28 5712.13,1505.91 5892,1505.91 5917.59,1531.5 6169.07,1531.5 6342.52,1704.95 6342.52,1782.68 HDR3.18@6390.55,1830.71
HB19: HDR3.19 U1.120 | length 2101.3
  Top Layer w7.87: U1.120@5092.52,733.27 5479.33,733.27 5687.99,941.93 5687.99,1437.22 5725.18,1474.41 5905.05,1474.41 5929.65,1499.02 6182.09,1499.02 6350.03,1666.96 6426.81,1666.96 HDR3.19@6490.55,1730.71
I\N\I\T\: R5.2 U1.107 U5.8 | length 1282
  Top Layer w7.87: U1.107@5092.52,477.36 5177.17,477.36 v1(5187.01,467.52) ; v1(5219.49,1245.08) 5219.49,1260.83 5257.87,1299.21 U5.8@5257.87,1338.58 ; v1(5267.84,1448.02) R5.2@5318.9,1447.83
  Bottom Layer w7.87: v1(5187.01,467.52) 5230.31,510.83 5230.31,831.96 5219.49,842.78 5219.49,1399.68 v1(5267.84,1448.02)
JTAG_NEXUS_TCK: HDR1.7 U1.6 | length 779.1
  Top Layer w7.87: HDR1.7@3381.1,1838.58 3431.1,1788.58 3431.1,1727.36 3461.62,1696.85 3487.21,1696.85 3840.55,1343.5 U1.6@3919.29,1343.5
JTAG_NEXUS_TDI: HDR1.5 U1.4 | length 679.3
  Top Layer w7.87: HDR1.5@3481.1,1838.58 3531.5,1788.19 3531.5,1698.82 3847.44,1382.87 U1.4@3919.29,1382.87
JTAG_NEXUS_TDO: HDR1.6 U1.5 | length 601.3
  Top Layer w7.87: HDR1.6@3481.1,1738.58 3481.1,1725.59 3843.5,1363.19 U1.5@3919.29,1363.19
JTAG_NEXUS_TMS: HDR1.8 U1.7 | length 710